# EAGLE board anti1_top (EAGLE 9.5.1)

Size 44.94 x 44.94 mm. Coordinates in mm from the lower left corner, seen from the top.
Outline: circle at 22.47,22.47 radius 22.47
Copper layers (1*16): Top 0.035mm / dielectric 1.5mm / Bottom 0.035mm
Design rules "default": minimum track width 6mil, minimum drill 0.35mm, track to track 6mil, track to pad 6mil, pad to pad 6mil, via to via 6mil, smd to smd 6mil, copper to edge 40mil, drill to drill 6mil, minimum pad ring 10mil, minimum via ring 8mil, stop-mask expansion 4mil, vias tented up to drill 0mil, thermal gap 10mil

## Footprints (pad centres in the part's own frame; a part is rotated, then mirrored left to right if it is on the bottom)
1X01_NO_SILK = drill 1.016 pad 1.88: 1 0,0

## Placement (x,y rotation side)
E$1  [1X01_NO_SILK]  2.15,22.47 0 top
E$2  [1X01_NO_SILK]  42.79,22.47 0 top

## Library data of the parts
E$1 E$2 = SparkFun-Connectors